# Altium PCB Main.PcbDoc (part 1 of 2)
Units mm, origin at the board's own origin, x right, y up, seen from the top; angles counter-clockwise.
Board outline 97 x 100 mm, 2 copper layers (Top Layer, Bottom Layer); 183 components, 114 nets, 627 pads, 356 vias.
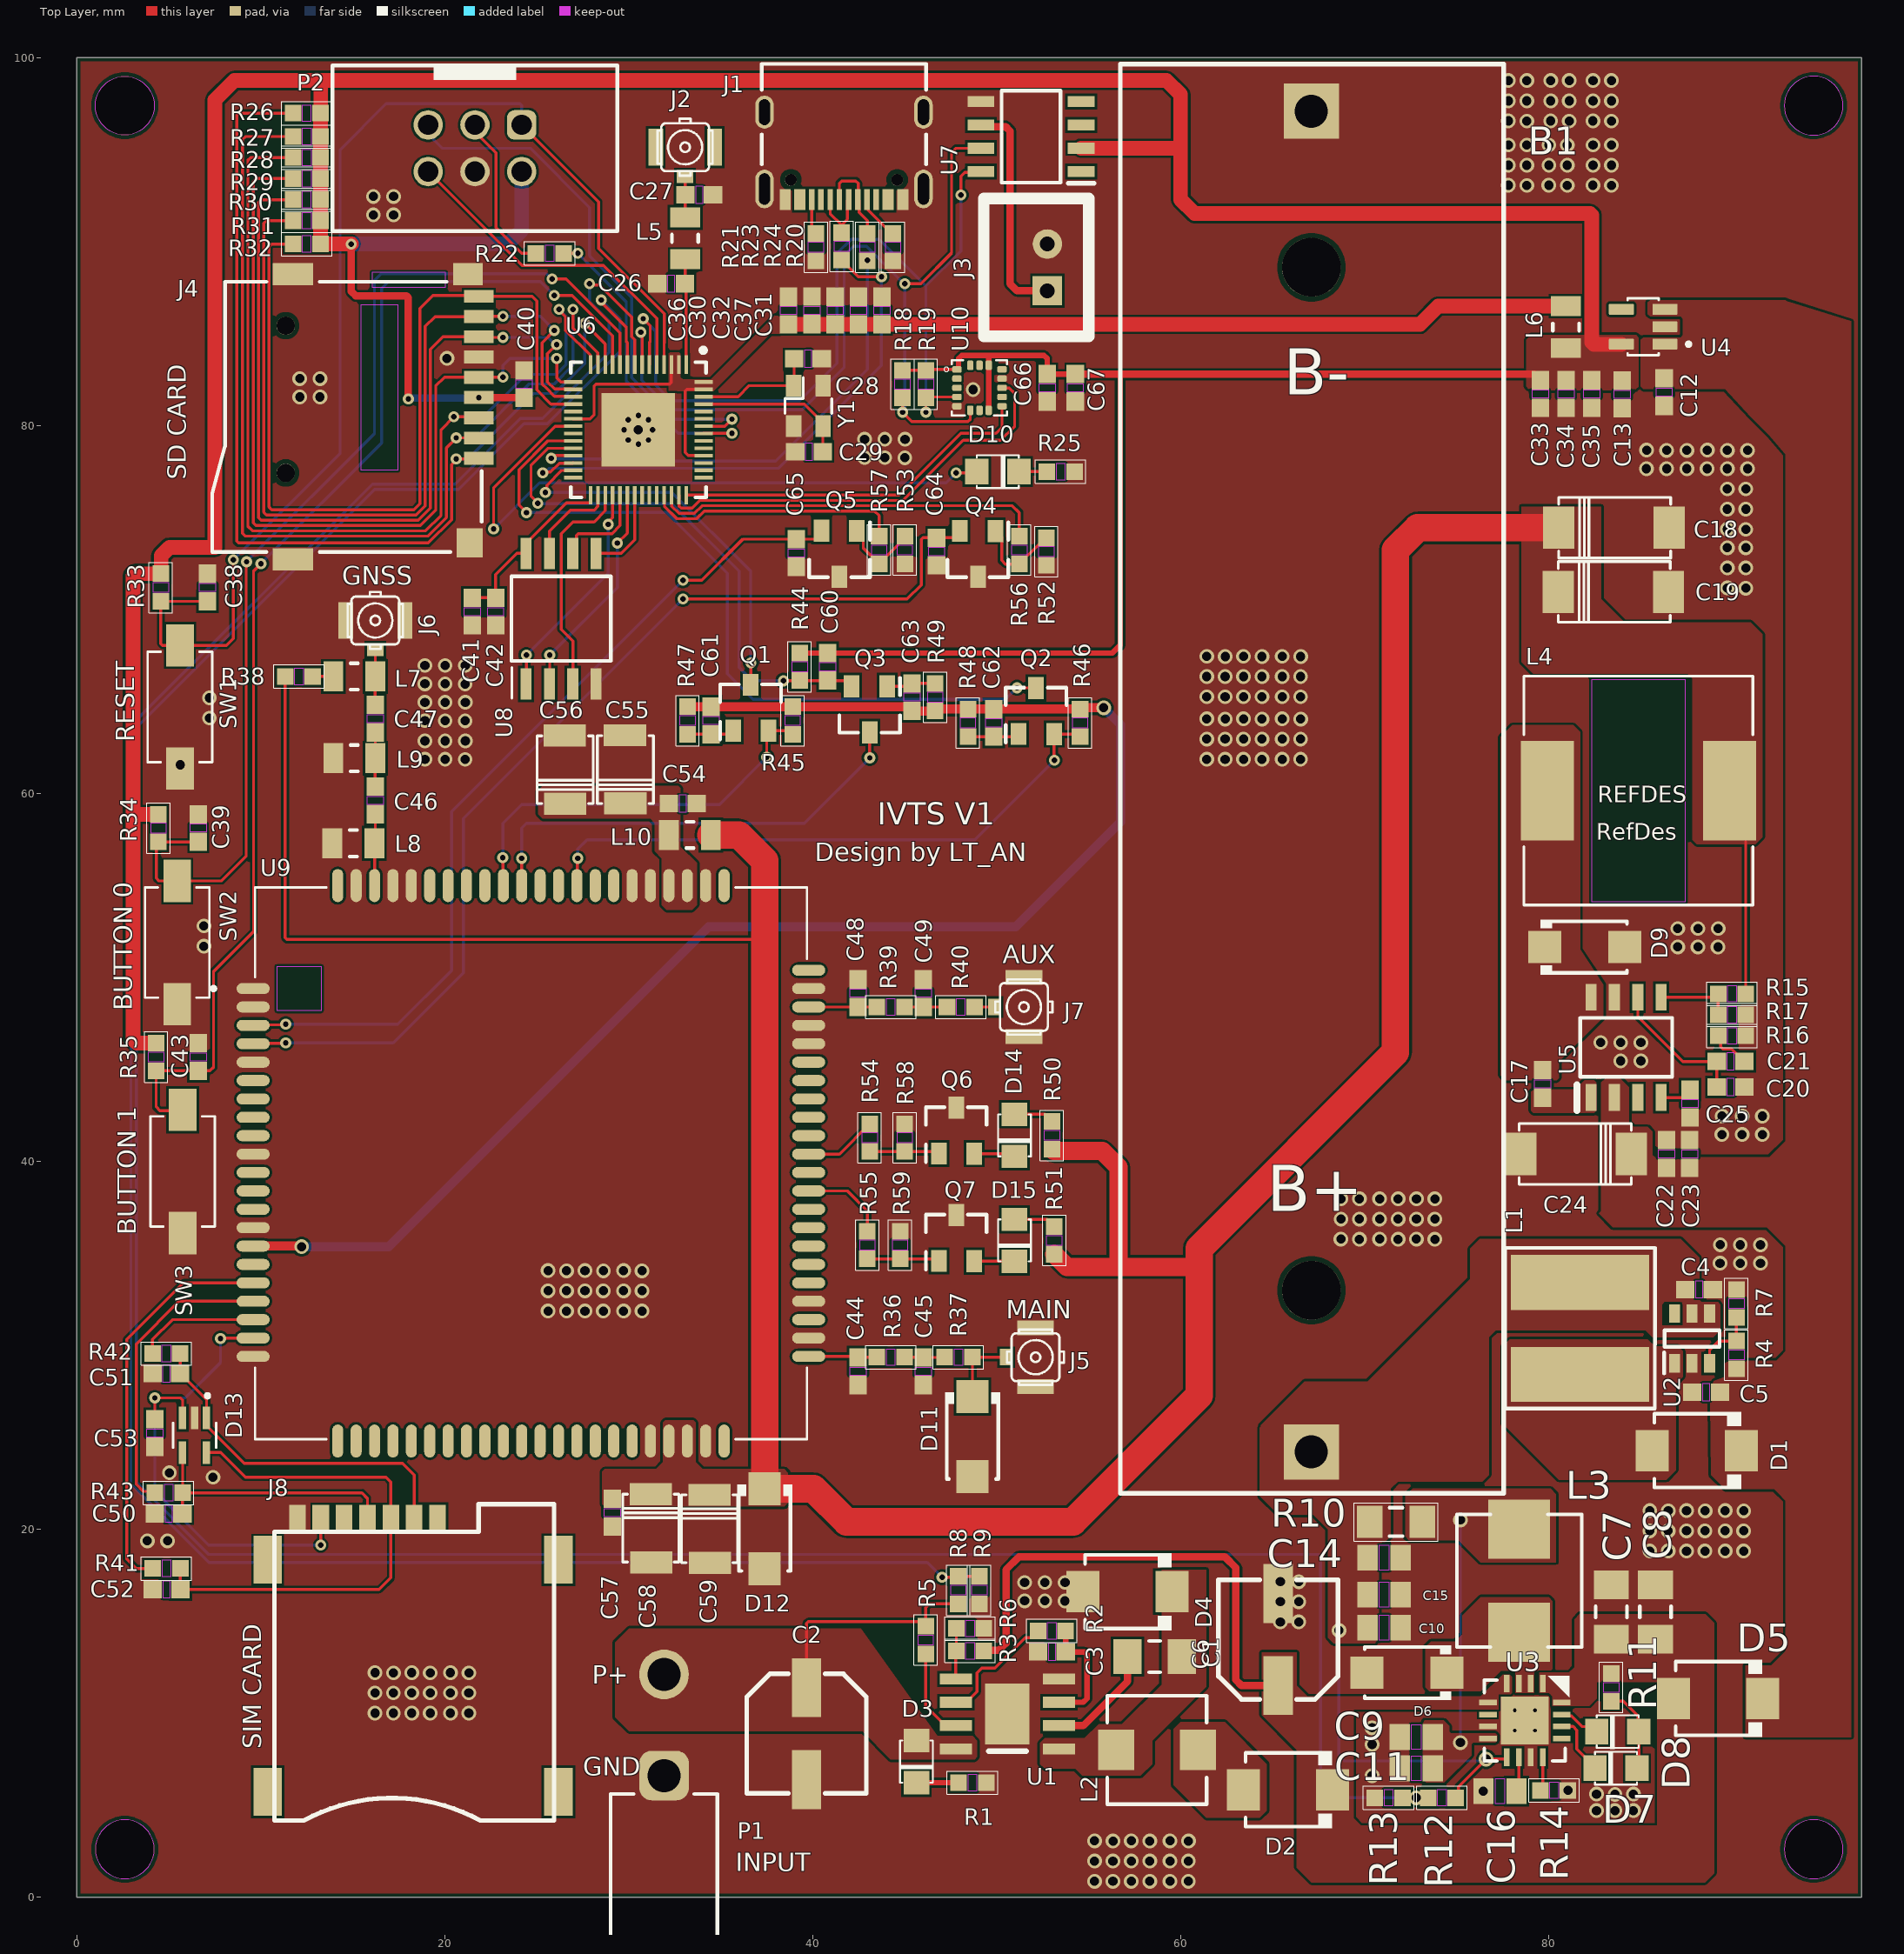
[diagram p0: Top Layer view]
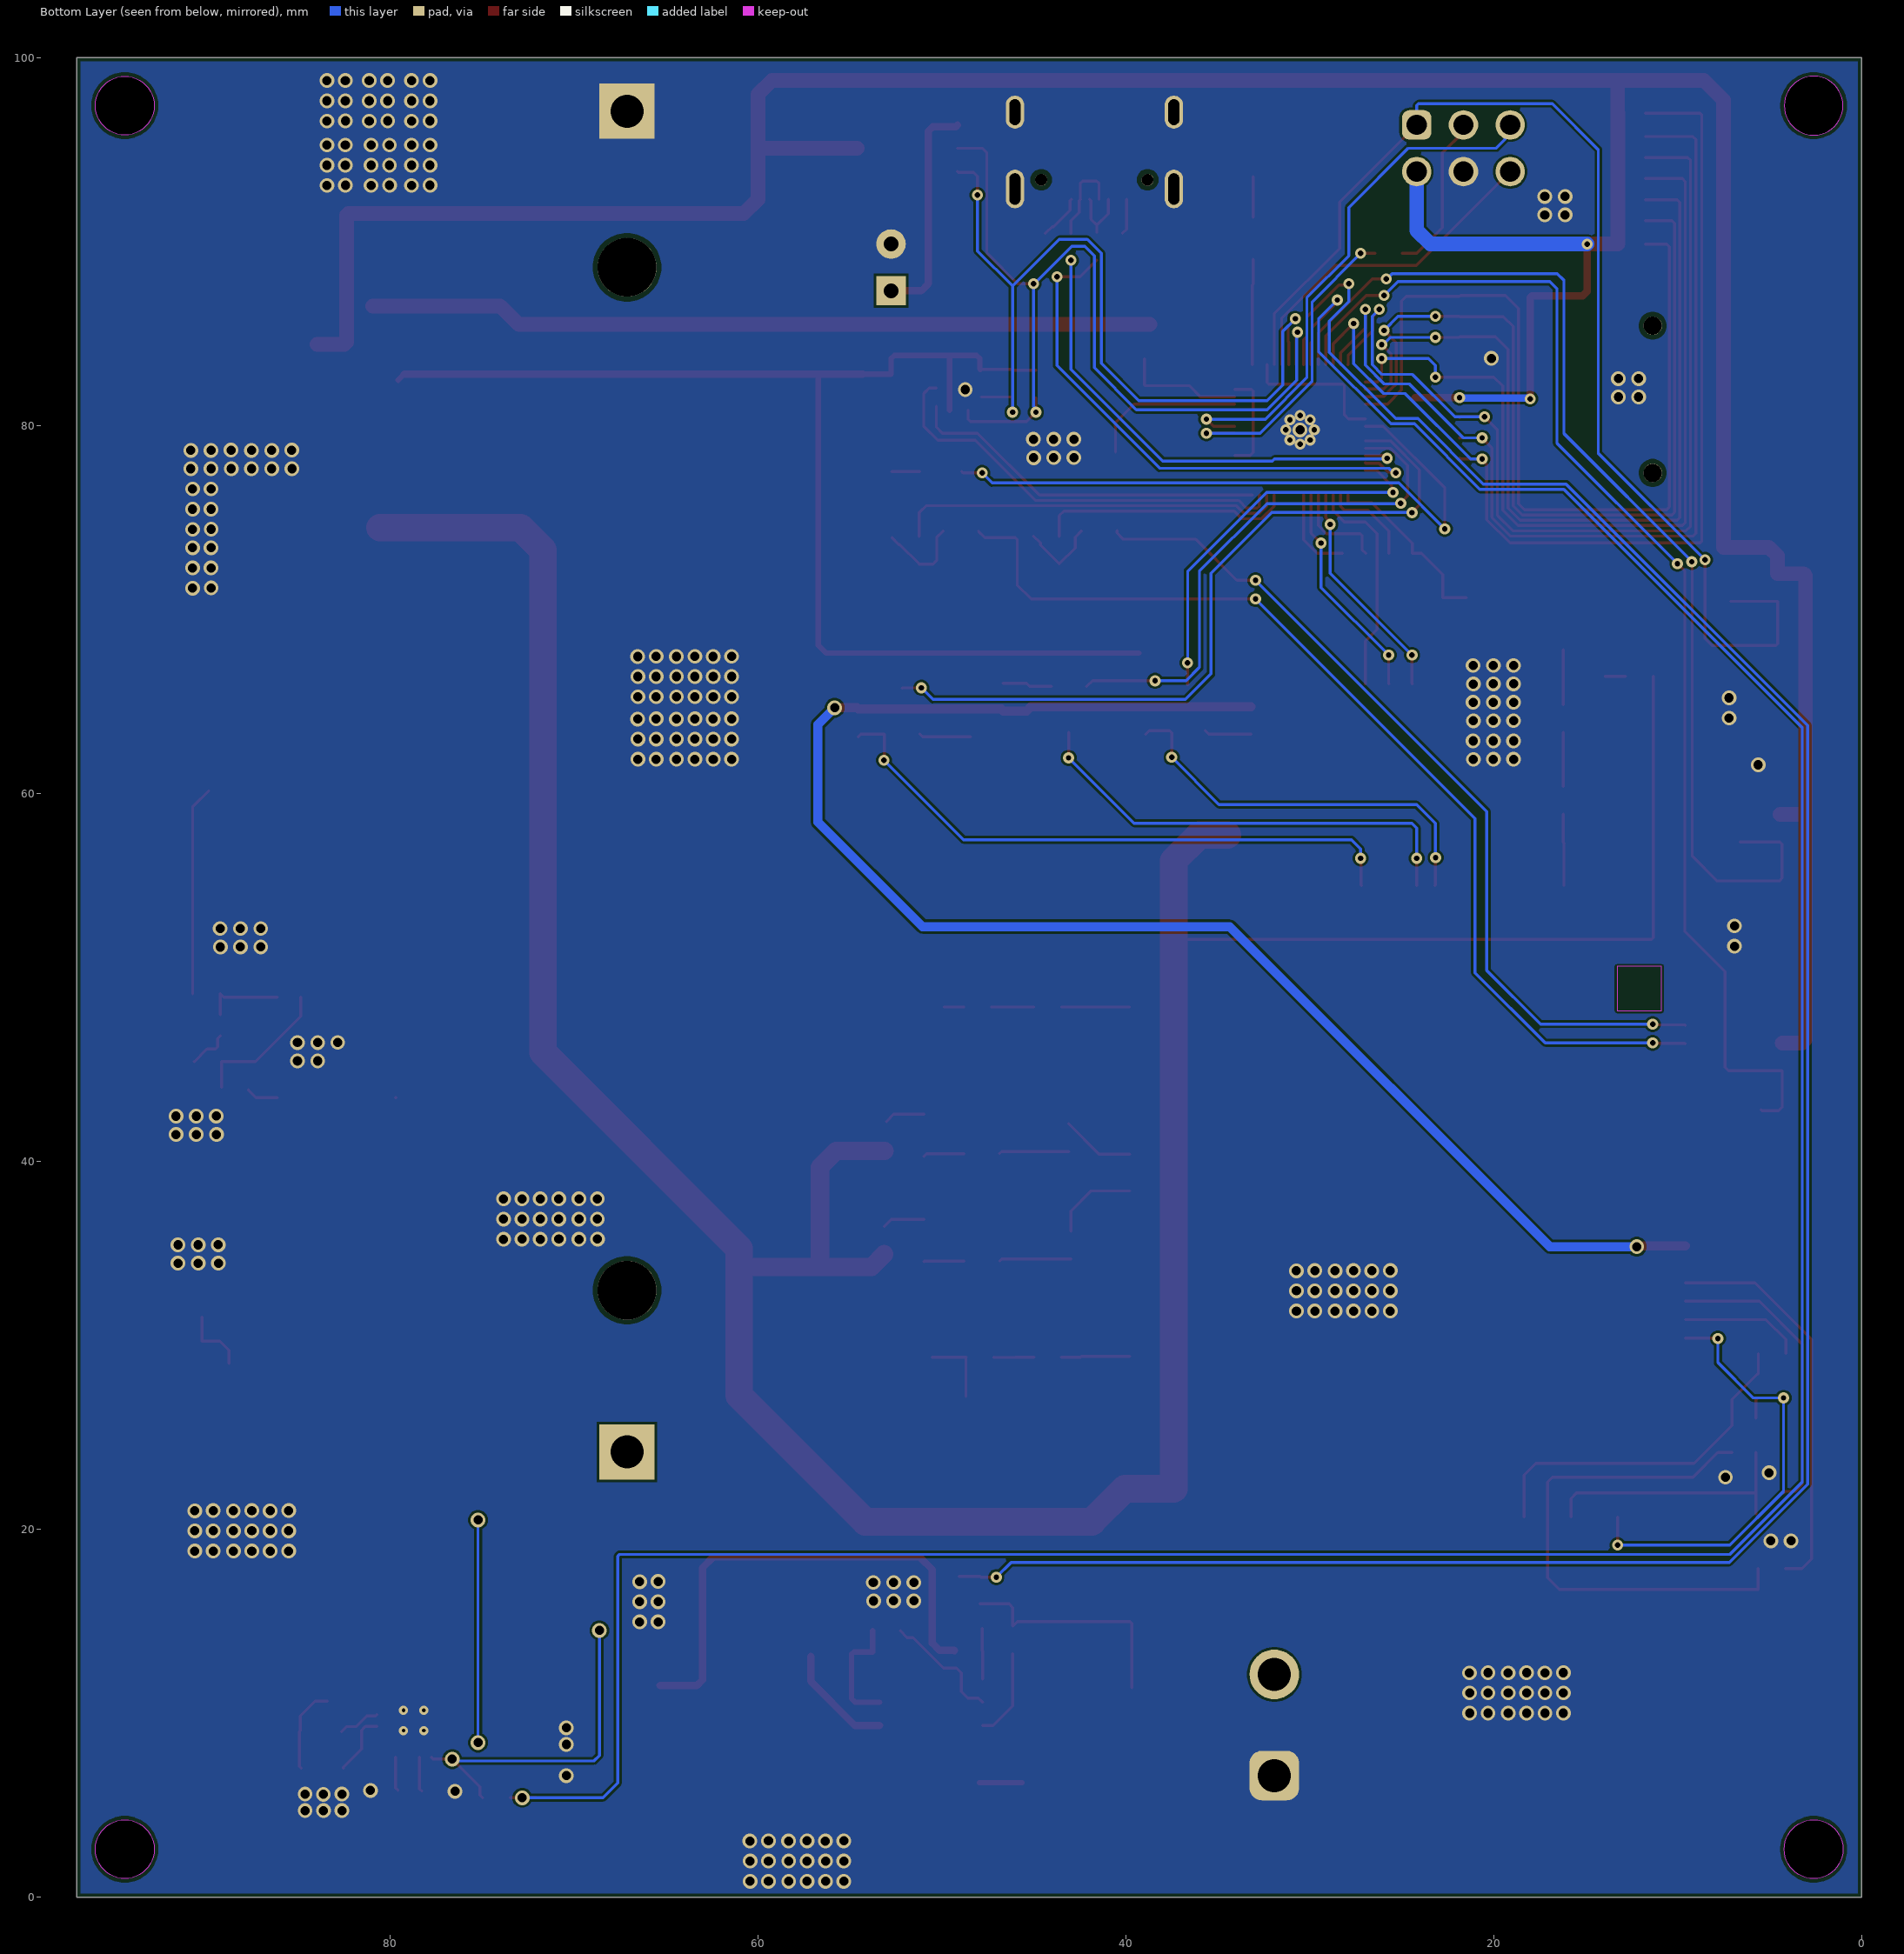
[diagram p1: Bottom Layer view, seen from below]

## Layer stack, top to bottom
Top Solder: solder mask 0.0102, Solder Resist, Dk 3.5
Top Layer: signal copper 0.0356
Dielectric 1: dielectric 0.32, FR-4, Dk 4.8
Bottom Layer: signal copper 0.0356
Bottom Solder: solder mask 0.0102, Solder Resist, Dk 3.5

## Board outline
0,0 0,100 97,100 97,0
cut-out: 92.8,97.4 ccw(c94.4,97.4) 94.4,95.8 ccw(c94.4,97.4) 96,97.4 ccw(c94.4,97.4) 94.4,99 ccw(c94.4,97.4)
cut-out: 92.8,2.6 ccw(c94.4,2.6) 94.4,1 ccw(c94.4,2.6) 96,2.6 ccw(c94.4,2.6) 94.4,4.2 ccw(c94.4,2.6)
cut-out: 2.6,95.8 cw(c2.6,97.4) 1,97.4 cw(c2.6,97.4) 2.6,99 cw(c2.6,97.4) 4.2,97.4 cw(c2.6,97.4)
cut-out: 1,2.6 ccw(c2.6,2.6) 2.6,1 ccw(c2.6,2.6) 4.2,2.6 ccw(c2.6,2.6) 2.6,4.2 ccw(c2.6,2.6)
cut-out: -139.8,-131 cw(c-139.8,-129.4) -141.4,-129.4 cw(c-139.8,-129.4) -139.8,-127.8 cw(c-139.8,-129.4) -138.2,-129.4 cw(c-139.8,-129.4)
cut-out: -141.4,-224.2 ccw(c-139.8,-224.2) -139.8,-225.8 ccw(c-139.8,-224.2) -138.2,-224.2 ccw(c-139.8,-224.2) -139.8,-222.6 ccw(c-139.8,-224.2)
cut-out: -231.6,-131 cw(c-231.6,-129.4) -233.2,-129.4 cw(c-231.6,-129.4) -231.6,-127.8 cw(c-231.6,-129.4) -230,-129.4 cw(c-231.6,-129.4)
cut-out: -233.2,-224.2 ccw(c-231.6,-224.2) -231.6,-225.8 ccw(c-231.6,-224.2) -230,-224.2 ccw(c-231.6,-224.2) -231.6,-222.6 ccw(c-231.6,-224.2)

## Design rules (kind name [scope] priority, off if disabled: settings)
BoardOutlineClearance [All] p1: gap=0.2 ignorepadtopadclearanceinfootprint=FALSE
Clearance [All] p1: gap=0.127 ignorepadtopadclearanceinfootprint=TRUE except(0.25: Arc-Hole Track-Hole SMDPad-Hole THPad-Hole Via-Hole Fill-Hole Poly-Hole Region-Hole Text-Hole)
ComponentClearance [All] p1: gap=0.127 collisioncheckmode=3 verticalgap=0.127 showdistances=TRUE
DiffPairsRouting [All] p1: maxlimit=0.254 minlimit=0.127 mostfreqgap=0.127 toplayer_minwidth=0.127 toplayer_maxwidth=25.4 toplayer_prefwidth=0.127 bottomlayer_minwidth=0.127 bottomlayer_maxwidth=25.4 bottomlayer_prefwidth=0.127 maxuncoupledlength=12.7
Height [All] p1: minheight=0 maxheight=1816.048 prefheight=12.7
HoleSize [All] p1: absolutevalues=TRUE maxlimit=6.3 minlimit=0.3 maxpercent=80.000 minpercent=20.000
HoleToHoleClearance [All] p1: gap=0.25 allowstackedmicrovias=FALSE
MinimumAnnularRing [All] p1: minimumring=0.076
MinimumSolderMaskSliver [All] p1: minsoldermaskwidth=0
PlaneClearance [All] p1: clearance=0.127
PlaneConnect PlaneConnectPowerPads [InPadClass('PowerPads')] p1: planeconnectstyle=Direct reliefexpansion=0.508 reliefentries=4 reliefconductorwidth=0.254 reliefairgap=0.254
PlaneConnect [All] p2: pad.planeconnectstyle=Relief pad.reliefexpansion=0.3 pad.reliefentries=4 pad.reliefconductorwidth=0.127 pad.reliefairgap=0.127 via.planeconnectstyle=Direct via.reliefexpansion=0.3 via.reliefentries=4 via.reliefconductorwidth=0.127 via.reliefairgap=0.127
PolygonConnect PolygonConnectPowerPads [All vs (InPadClass('PowerPads'))] p1: connectstyle=Direct reliefconductorwidth=0.254 reliefentries=4 polygonreliefangle="90 Angle" airgapwidth=0.254
PolygonConnect [All] p2: connectstyle=Direct reliefconductorwidth=0.127 reliefentries=4 polygonreliefangle="90 Angle" airgapwidth=0.127
RoutingVias [All] p1: holewidth=0.3 width=0.6 viastyle="Through Hole" minholewidth=0.3 minwidth=0.6 maxholewidth=0.6 maxwidth=6.6
SilkToSilkClearance [All] p1: silktosilkclearance=0
SilkToSolderMaskClearance [IsPad] p1: minsilkscreentomaskgap=0.127 clearancetoexposedcopper=TRUE
SolderMaskExpansion [All] p1: expansion=0.013 istentingtop=FALSE
SupplyNets "Schematic Supply Nets_9" [InNet('GND')] p1: voltage=0.000
SupplyNets "Schematic Supply Nets_7" [InNet('+5V-BUCK')] p2: voltage=0.000
SupplyNets "Schematic Supply Nets_2" [InNet('+12V')] p3: voltage=0.000
SupplyNets "Schematic Supply Nets_8" [InNet('V-MCU')] p4: voltage=0.000
SupplyNets "Schematic Supply Nets_6" [InNet('V-SIM')] p5: voltage=0.000
SupplyNets "Schematic Supply Nets_5" [InNet('+1.8V')] p6: voltage=0.000
SupplyNets "Schematic Supply Nets_4" [InNet('+5V')] p7: voltage=0.000
SupplyNets "Schematic Supply Nets_1" [InNet('FL-VDD')] p8: voltage=0.000
SupplyNets "Schematic Supply Nets" [InNet('+3.3V-MCU')] p9: voltage=0.000
Width [All] p1: maxlimit=25.4 minlimit=0.16 preferedwidth=0.16 minimp=50.000000 maximp=50.000000 favimp=50.000000
20 further rules are at their usual default settings.

## Classes and differential pairs
net class POWER: +5V-BUCK BATTERY+ V-MCU V-SIM
component class U_SIM7600CE: C44 C45 C46 C47 C48 C49 C50 C51 C52 C53 C54 C55 C56 C57 C58 C59 C60 C61 C62 C63 C64 C65 D11 D12 D13 D14 D15 J5 J6 J7 J8 L7 L8 L9 L10 Q1 Q2 Q3 Q4 Q5 Q6 Q7 R36 R38 R40 R42 R44 R45 R47 R49 R52 R54 R56 R59 U9
component class U_Power: B1 C1 C2 C3 C4 C5 C6 C7 C8 C9 C10 C11 C12 C13 C14 C15 C16 C17 C18 C19 C20 C21 C22 C23 C24 C25 D1 D2 D3 D4 D5 D6 D7 D8 D9 L1 L2 L3 L4 P1 R1 R2 R3 R4 R5 R6 R7 R8 R9 R10 R11 R12 R13 R15 R17 U1 U2 U3 U4 U5
component class U_LIS3DH: C66 C67 U10
component class U_ESP32S3: C26 C27 C28 C29 C30 C31 C32 C33 C34 C35 C36 C37 C38 C39 C40 C41 C42 C43 D10 J1 J2 J3 J4 L5 L6 P2 R17 R19 R21 R23 R26 R28 R30 R32 R34 SW1 SW2 SW3 U6 U7 U8 Y1

## Components (designator, comment, footprint, x,y, rotation, side; value= is the part's Value field where it differs from the comment)
B1 "18650-1C" 18650-1C 56.59,60.534 r90 top
C1 "0.1uF" CAP_1206 58.582,13.076 r0 top
C2 "22u" ALU-SMD-CAP-D-6.3mm 39.659,8.885 r270 top
C3 "1u" CAP_0603 52.994,13.33 r0 top
C4 "22u" CAP_0603 88.176,33.036 r180 top
C5 "22u" CAP_0603 88.557,27.448 r0 top
C6 "100u" ALU-SMD-CAP-D-6.3mm 65.3,14 r90 top
C7 "104" CAP_1206 83.4,15.5 r270 top
C8 "22u" CAP_1206 85.8,15.5 r270 top
C9 "104" CAP_0805 72.8,8.7 r0 top
C10 "105" CAP_0805 71.05,14.65 r180 top
C11 "106" CAP_0805 72.8,7 r0 top
C12 "1u" CAP_0603 86.276,81.823 r90 top
C13 "1u" CAP_0603 83.99,81.696 r90 top
C14 "106" CAP_0805 71.05,18.45 r180 top
C15 "104" CAP_0805 71.05,16.45 r180 top
C16 "104" CAP_0805 77.35,5.75 r0 top
C17 "0.1u" CAP_0603 79.667,44.212 r90 top
C18 "47u" C_Tanta_C6032 80.538,74.453 r0 top
C19 "47u" C_Tanta_C6032 80.512,70.96 r0 top
C20 "33p" CAP_0603 89.889,44.035 r180 top
C21 "1n" CAP_0603 89.889,45.432 r180 top
C22 "105" CAP_0603 86.398,40.402 r270 top
C23 "104" CAP_0603 87.668,40.402 r270 top
C24 "47u" C_Tanta_C6032 84.493,40.402 r180 top
C25 "10n" CAP_0603 87.674,43.14 r90 top
C26 "NP" CAP_0603 32.302,87.717 r0 top
C27 "1.8p" CAP_0603 33.826,92.543 r180 top
C28 "22p" CAP_0603 39.732,83.639 r180 top
C29 "22p" CAP_0603 39.795,78.573 r180 top
C30 "106" CAP_0603 39.949,86.269 r270 top
C31 "105" CAP_0603 43.759,86.257 r270 top
C32 "104" CAP_0603 41.219,86.257 r270 top
C33 "105" CAP_0603 79.544,81.722 r90 top
C34 "104" CAP_0603 80.941,81.722 r90 top
C35 "104" CAP_0603 82.338,81.722 r270 top
C36 "105" CAP_0603 38.679,86.257 r270 top
C37 "104" CAP_0603 42.489,86.257 r270 top
C38 "104" CAP_0603 7.099,71.201 r90 top
C39 "104" CAP_0603 6.591,58.12 r90 top
C40 "104" CAP_0603 24.301,82.256 r270 top
C41 "105" CAP_0603 21.489,69.891 r90 top
C42 "106" CAP_0603 22.759,69.891 r90 top
C43 "104" CAP_0603 6.591,45.674 r90 top
C44 "Cap_NP" CAP_0603 42.456,28.591 r90 top
C45 "Cap_NP" CAP_0603 46.012,28.591 r90 top
C46 "Cap_NP" CAP_0603 16.217,59.629 r270 top
C47 "33p" CAP_0603 16.217,64.074 r270 top
C48 "Cap_NP" CAP_0603 42.456,49.144 r270 top
C49 "Cap_NP" CAP_0603 46.012,49.144 r270 top
C50 "22p" CAP_0603 4.985,20.839 r180 top
C51 "22p" CAP_0603 4.858,28.459 r180 top
C52 "22p" CAP_0603 4.87,16.724 r180 top
C53 "104" CAP_0603 4.235,25.233 r270 top
C54 "1u" CAP_0603 32.931,59.452 r180 top
C55 "100u" C_Tanta_B3528 29.812,59.46 r90 top
C56 "100u" C_Tanta_B3528 26.538,59.452 r90 top
C57 "100n" CAP_0603 29.1,20.9 r90 top
C58 "100u" C_Tanta_B3528 31.2,21.9 r270 top
C59 "100u" C_Tanta_B3528 34.387,21.868 r270 top
C60 "470p" CAP_0603 40.811,66.889 r90 top
C61 "102" CAP_0603 34.461,63.968 r270 top
C62 "102" CAP_0603 49.828,63.841 r270 top
C63 "102" CAP_0603 45.383,65.238 r90 top
C64 "104" CAP_0603 46.728,73.158 r270 top
C65 "104" CAP_0603 39.101,73.08 r270 top
C66 "104" CAP_0603 52.743,82.058 r90 top
C67 "104" CAP_0603 54.267,82.058 r90 top
D1 "SS54" SMB 88.049,24.273 r180 top
D2 "SS54" SMB 65.821,5.837 r180 top
D3 "" LED-0805-Red 45.628,8.504 r270 top
D4 "SS54" SMB 57.1,16.6 r180 top
D5 "SS54" SMB 89.2,10.8 r180 top
D6 "SS34" SMA 72.3,12.2 r180 top
D7 "LED" LED-0805-Red 84.8,7 r180 top
D8 "LED" LED-0805-Red 84.9,9 r180 top
D9 "SS34" SMA 81.959,51.649 r0 top
D10 "" LED-0805-Red 48.911,77.497 r0 top
D11 "SMAJ5.0" SMA 48.679,25.035 r270 top
D12 "SMAJ5.0" SMA 37.382,20.026 r270 top
D13 "ESDA6V1W5" SOT65P210X110-5N 6.394,25.106 r270 top
D14 "LED" LED-0805-Red 50.965,42.561 r270 top
D15 "LED" LED-0805-Red 50.965,36.846 r270 top
J1 "629722000214" 629722000214 41.694,95.901 r180 top
J2 "ANT_CONN" IPEX 33.058,95.139 r270 top
J3 "NTC 10K" XH2.54M-2 52.749,87.336 r90 top
J4 "693071040911" 693071040911 16.297,80.48 r270 top
J5 "ANT_CONN" IPEX 52.108,29.353 r180 top
J6 "ANT_CONN" IPEX 16.217,69.408 r270 top
J7 "ANT_CONN" IPEX 51.473,48.394 r180 top
J8 "MicroSimcard" "MICRO SIM SOCKET" 18.272,13.188 r0 top
L1 "10uH" CD75 81.699,33.417 r180 top
L2 "4.7uH" IND-0520 58.709,7.996 r0 top
L3 "22uH" IND-0630 78.4,17.2 r90 top
L4 "4.7uH-3A" IND_CDRH127-4R7NC_SUM 84.88,60.158 r0 top
L5 "3nH" INDC-0805 33.058,90.186 r90 top
L6 "2.7nH" INDC-0805 80.937,85.36 r270 top
L7 "47n" INDC-0805 15.074,66.36 r180 top
L8 "L_NP" INDC-0805 15.024,57.293 r0 top
L9 "L_NP" INDC-0805 15.074,61.915 r0 top
L10 "FB-30R" INDC-0805 33.318,57.745 r0 top
P1 "64900229522" 64900229522 31.912,-0.894 r0 top
P2 "61200621621" 61200621621 21.634,95.083 r180 top
Q1 "2N3904" SOT-23 36.614,64.659 r0 top
Q2 "2N3904" SOT-23 52.128,64.485 r0 top
Q3 "2N3904" SOT-23 43.096,64.577 r180 top
Q4 "BC817" SOT-23 48.978,73.029 r180 top
Q5 "BC817" SOT-23 41.457,73.034 r180 top
Q6 "BC817" SOT-23 47.79,41.672 r0 top
Q7 "BC817" SOT-23 47.79,35.83 r0 top
R1 "10K" RES_0603 48.676,6.218 r0 top
R2 "100k" RES_0603 52.994,14.473 r0 top
R3 "110K" RES_0603 48.543,13.386 r0 top
R4 "91K" RES_0603 90.208,29.48 r270 top
R5 "10K" RES_0603 46.136,13.977 r90 top
R6 "20k" RES_0603 48.549,14.6 r180 top
R7 "12k" RES_0603 90.208,32.274 r270 top
R8 "100K" RES_0603 47.908,16.688 r90 top
R9 "10K" RES_0603 49.051,16.688 r270 top
R10 "0.1R" RES_1206 71.7,20.4 r180 top
R11 "1K" RES_0603 83.4,11.4 r90 top
R12 "100K" RES_0603 74.2,5.4 r0 top
R13 "10K" RES_0603 71.3,5.4 r0 top
R14 "50K" RES_0603 80.3,5.8 r180 top
R15 "20K/1%" RES_0603 89.96,49.109 r0 top
R16 "30K/1%" RES_0603 89.96,46.823 r180 top
R17 "5K/1%" RES_0603 89.96,47.966 r180 top
R18 "10K" RES_0603 44.875,82.256 r90 top
R19 "10K" RES_0603 46.145,82.256 r90 top
R20 "5.1K" RES_0603 44.361,89.701 r270 top
R21 "5.1K" RES_0603 40.17,89.701 r270 top
R22 "30R" RES_0603 25.698,89.368 r180 top
R23 "0R" RES_0603 41.567,89.752 r90 top
R24 "0R" RES_0603 42.964,89.701 r90 top
R25 "330" RES_0603 53.471,77.497 r0 top
R26 "10K" RES_0603 12.49,96.988 r0 top
R27 "10K" RES_0603 12.49,95.718 r0 top
R28 "10K" RES_0603 12.49,94.575 r0 top
R29 "10K" RES_0603 12.49,93.432 r0 top
R30 "10K" RES_0603 12.49,92.289 r0 top
R31 "10K" RES_0603 12.49,91.146 r0 top
R32 "10K" RES_0603 12.49,89.876 r0 top
R33 "10K" RES_0603 4.559,71.201 r90 top
R34 "10K" RES_0603 4.432,58.12 r90 top
R35 "10K" RES_0603 4.305,45.674 r90 top
R36 "0R" RES_0603 44.234,29.353 r0 top
R37 "0R" RES_0603 47.917,29.353 r0 top
R38 "10R" RES_0603 12.07,66.365 r0 top
R39 "0R" RES_0603 44.234,48.394 r0 top
R40 "0R" RES_0603 48.044,48.394 r0 top
R41 "51R" RES_0603 4.87,17.867 r180 top
R42 "51R" RES_0603 4.858,29.551 r180 top
R43 "51R" RES_0603 4.985,21.982 r180 top
R44 "1K" RES_0603 39.287,66.889 r90 top
R45 "1K" RES_0603 38.906,63.968 r270 top
R46 "1K" RES_0603 54.527,63.841 r270 top
R47 "4.7K" RES_0603 33.191,63.968 r270 top
R48 "4.7K" RES_0603 48.431,63.841 r270 top
R49 "4.7K" RES_0603 46.653,65.238 r90 top
R50 "1K" RES_0603 52.997,41.418 r270 top
R51 "1K" RES_0603 53.124,35.703 r270 top
R52 "47K" RES_0603 52.697,73.158 r270 top
R53 "47K" RES_0603 45.002,73.239 r270 top
R54 "4.7K" RES_0603 43.091,41.291 r90 top
R55 "4.7K" RES_0603 42.964,35.449 r90 top
R56 "4.7K" RES_0603 51.225,73.239 r270 top
R57 "4.7K" RES_0603 43.605,73.239 r270 top
R58 "47K" RES_0603 44.996,41.291 r270 top
R59 "47K" RES_0603 44.742,35.449 r270 top
SW1 "434121050816" 434121050816 5.6,64.704 r90 top
SW2 "434121050816" 434121050816 5.448,51.897 r90 top
SW3 "434121050816" 434121050816 5.748,39.451 r90 top
U1 "MP2482" SOP8-P 50.575,9.957 r90 top
U2 "SX1308" SOT23-6 87.795,30.369 r90 top
U3 "TP5100" QFN16 78.7,9.6 r270 top
U4 "AP2112K-3.3TRG1" SOT95P285X140-5N 85.133,85.379 r180 top
U5 "TPS54231" SOIC8-1.75H 84.208,46.197 r90 top
U6 "ESP32-S3" QFN56 30.518,79.772 r270 top
U7 "DS3231M" SOP8-P1.27 51.86,95.718 r180 top
U8 "W25Q128" SOIC127P790X216-8N 26.315,69.51 r90 top
U9 "SIM7600E" XCVR_SIM7600E 24.676,39.894 r0 top
U10 "LIS3DSH" LGA16R50P5X3_300X300X100N 49.06,82.058 r0 top
Y1 "40MHz" Y-3225 39.859,81.099 r270 top

## Footprints (in the part's own frame and the unit in brackets; to place one, negate y for a bottom-side part, rotate by r counter-clockwise, add the part's x,y. Pads: shape width x height; smd on the part's side, far side on the other; paste and mask are expansions set on the pad)
18650-1C [mm] "1Cell 18650 battery holder"
  rect 3x3 hole 1.8: 1(-36.334,-10.51) 2(36.566,-10.51)
  round 3.2 hole 3.2 unplated: ""(-27.544,-10.51) ""(28.076,-10.51)
  silkscreen extent -38.58,-20.96 39.12,-0.13, body extent -32.25,-19.53 32.75,-1.33, height 21.8
61200621621 [mm] "6 pins, straight, gold plating"
  rrect50% 1.6x1.6 hole 1.1: 1(-2.54,-1.27)
  round 1.6 hole 1.1: 2(-2.54,1.27) 3(0,-1.27) 4(0,1.27) 5(2.54,-1.27) 6(2.54,1.27)
  silkscreen extent -7.74,-4.5 7.74,4.5, body extent -7.64,-4.43 7.64,4.75, height 9.13
64900229522 [mm] "4.20mm Male Dual Row Angled Header, 2p"
  rrect50% 2.7x2.7 hole 1.8: 1(0,7.5)
  round 2.7 hole 1.8: 2(0,13)
  silkscreen extent -2.9,-6.5 2.9,6.5, body extent -2.7,-6.4 3.02,13.57, height 11.43
434121050816 [mm] "SMD Tact Switch, body 6x3.5mm"
  rect 2.3x1.5 smd: 1(-3.35,0) 2(3.35,0)
  silkscreen extent -3,-1.75 3,1.75, body extent -4,-1.75 4,1.75, height 5
629722000214 [mm] "USB TYPE C VERTICAL PLUG"
  rect 0.6x1.14 smd: A1/B12(-3.2,3.605) A4/B9(-2.4,3.605) A9/B4(2.4,3.605) A12/B1(3.2,3.605)
  rect 0.3x1.14 smd: A5(-1.25,3.605) A6(-0.25,3.605) A7(0.25,3.605) A8(1.25,3.605) B5(1.75,3.605) B6(0.75,3.605) B7(-0.75,3.605) B8(-1.75,3.605)
  round 0.65 hole 0.65 unplated: MH1(-2.89,2.535) MH2(2.89,2.535)
  oval 1x2.1 hole 0.6 slot 1.7 at 90 deg: Shell(-4.32,3.035) Shell(4.32,3.035)
  oval 1x1.8 hole 0.6 slot 1.4 at 90 deg: Shell(-4.32,-1.145) Shell(4.32,-1.145)
  silkscreen extent -4.47,-3.76 4.47,1.69, body extent -4.79,-3.76 4.79,3.95, height 3.33
693071040911 [mm] "MicroSD push-push CD SMT"
  rect 0.7x1.6 smd: 1(2.25,5.55) 2(1.15,5.55) 3(0.05,5.55) 4(-1.05,5.55) 5(-2.15,5.55) 6(-3.25,5.55) 7(-4.35,5.55) 8(-5.45,5.55) 9(-6.55,5.55)
  round 1 hole 1 unplated: MH1(-4.95,-4.95) MH2(3.05,-4.95)
  rect 1.2x1.6 smd: Shell(-7.75,4.95)
  rect 1.2x2.2 smd: Shell(-7.75,-4.55) Shell(7.75,-4.55)
  rect 1.6x1.4 smd: Shell(6.85,5.05)
  Top Layer keep-out region: -6.1,1.15 2.9,1.15 2.9,-0.85 -6.1,-0.85
  Top Layer keep-out region: -7.05,3.75 -7.85,3.75 -7.85,-0.25 -7.05,-0.25
  silkscreen extent -7.35,-8.95 7.35,5.7, body extent -8.05,-8.95 8.05,6.05, height 1.9
ALU-SMD-CAP-D-6.3mm [mm]
  rect 3.2x1.6 smd: 1(-2.5,0) 2(2.5,0)
  silkscreen extent -3.25,-3.25 3.25,3.25, body extent -3.64,-3.3 3.66,3.3, height 5.8
C_Tanta_B3528 [mm]
  rect 1.2x2.3 smd: 1(0,0) 2(3.708,0.025)
  silkscreen extent 0,-1.52 3.68,1.52, body extent 0.08,-1.4 3.58,1.4, height 1.9
C_Tanta_C6032 [mm]
  rect 1.7x2.3 smd: 1(0,0) 2(6,0)
  silkscreen extent 0,-1.65 6.1,1.65, body extent 0.05,-1.6 6.05,1.6, height 2.5
CAP_0603 [mm] "Chip Capacitor, 2-Leads, Body 1.60x0.80mm, IPC Medium Density"
  rect 1x0.95 smd: 1(-0.75,0) 2(0.75,0)
  Top Layer keep-out region: -0.203,-0.457 0.203,-0.457 0.203,0.457 -0.203,0.457
  body extent -0.85,-0.45 0.85,0.45, height 0.9
CAP_0805 [mm] "Chip Capacitor, 2-Leads, Body 2.00x1.25mm, IPC Medium Density"
  rect 1.1x1.4 smd: 1(-0.9,0) 2(0.9,0)
  Top Layer keep-out region: -0.279,-0.66 0.279,-0.66 0.279,0.66 -0.279,0.66
  body extent -1.05,-0.67 1.05,0.67, height 1.25
CAP_1206 [mm] "Chip Capacitor, 2-Leads, Body 3.20x1.60mm, IPC Low Density"
  rect 1.55x1.9 smd: 1(-1.475,0) 2(1.475,0)
  silkscreen extent -0.3,-0.85 0.3,0.85, body extent -1.7,-0.9 1.7,0.9, height 1.05
CD75 [mm]
  rect 7.5x3 smd: 1(0,0) 2(0,5)
  silkscreen extent -4.08,-1.88 4.06,6.86, body extent -3.5,-1.29 3.5,6.37, height 5.04
IND-0520 [mm] "Molded Inductor, 2-Leads, Body 5.20x5.70mm, IPC Medium Density"
  rect 1.95x2.2 smd: 1(-2.225,0) 2(2.225,0)
  silkscreen extent -2.7,-2.95 2.7,2.95, body extent -2.8,-2.5 2.8,2.5, height 3.01
IND-0630 [mm] "Molded Inductor, 2-Leads, Body 7.05x7.65mm, IPC Low Density"
  rect 3.2x3.35 smd: 1(-2.8,0) 2(2.8,0)
  silkscreen extent -3.6,-3.39 3.6,3.39, body extent -3.62,-3.32 3.68,3.38, height 3.01
IND_CDRH127-4R7NC_SUM [mil]
  rect 114x213 smd paste+0 mask+0: 1(-195,0) 2(195,0)
  Top Layer keep-out region: -100,-238 -100,238 100,238 100,-238
  silkscreen extent -245,-245 245,245, body extent -240,-240 240,240, height 315
INDC-0805 [mm] "Chip Inductor, 2-Leads, Body 2.10x1.35mm, IPC Low Density"
  rect 1.08x1.63 smd: 1(-1.14,0) 2(1.14,0)
  silkscreen extent -0.2,-0.72 0.2,0.72, body extent -1.1,-0.75 1.1,0.75, height 1
IPEX [mm] "IPX surface mount receptacle plug"
  rect 0.7x0.9 smd: 1(1.6,0)
  rect 2x0.8 smd: 2(0,1.6) 2(0,-1.6)
  silkscreen extent -1.55,-1.5 1.55,1.5, body extent -1.55,-1.53 1.45,1.47, height 1.25
LED-0805-Red [mil]
  rect 50x55 smd: 1(0,0) 2(90,0)
  silkscreen extent 0,-35 90,37, body extent 5,-25 85,25, height 43
LGA16R50P5X3_300X300X100N [mm]
  rrect53% 0.52x0.35 smd mask+0: 1(-1.225,1) 2(-1.225,0.5) 3(-1.225,0) 4(-1.225,-0.5) 5(-1.225,-1) 9(1.225,-1) 10(1.225,-0.5) 11(1.225,0) 12(1.225,0.5) 13(1.225,1)
  rrect53% 0.35x0.52 smd mask+0: 6(-0.5,-1.225) 7(0,-1.225) 8(0.5,-1.225) 14(0.5,1.225) 15(0,1.225) 16(-0.5,1.225)
  silkscreen extent -1.93,-1.5 1.5,1.5
"MICRO SIM SOCKET" [mm]
  rect 0.9x1.35 smd: 1(-5.02,7.473) 2(-2.48,7.473) 3(0.06,7.473) 5(-6.29,7.473) 6(-3.75,7.473) 7(-1.21,7.473) 8(1.33,7.473)
  rect 1.55x2.6 smd: 4(-7.9,-7.472) 4(-7.9,5.148) 4(7.9,-7.472) 4(7.9,5.148)
  silkscreen extent -7.54,-9.03 7.66,8.17, body extent -8.14,-9.03 8.26,8.17, height 1.36
QFN16 [mm] "QFN, 16-Leads, Body 4.00x4.00mm, Pitch 0.65mm, Thermal Pad 2.60x2.60mm, IPC Low Density"
  rect 0.95x0.3 smd: 1(-2,0.975) 2(-2,0.325) 3(-2,-0.325) 4(-2,-0.975) 9(2,-0.975) 10(2,-0.325) 11(2,0.325) 12(2,0.975)
  rect 0.3x0.95 smd: 5(-0.975,-2) 6(-0.325,-2) 7(0.325,-2) 8(0.975,-2) 13(0.975,2) 14(0.325,2) 15(-0.325,2) 16(-0.975,2)
  rect 2.6x2.6 smd: 17(0,0)
  silkscreen extent -2.41,-2.2 2.2,2.41, body extent -2.1,-2.1 2.1,2.1, height 0.9
QFN56 [mm] "QFN, 56-Leads, Body 7.00x7.00mm, Pitch 0.40mm, Thermal Pad 4.00x4.00mm, IPC Low Density"
  rect 1x0.2 smd: 1(-3.55,2.6) 2(-3.55,2.2) 3(-3.55,1.8) 4(-3.55,1.4) 5(-3.55,1) 6(-3.55,0.6) 7(-3.55,0.2) 8(-3.55,-0.2) 9(-3.55,-0.6) 10(-3.55,-1) 11(-3.55,-1.4) 12(-3.55,-1.8) 13(-3.55,-2.2) 14(-3.55,-2.6) 29(3.55,-2.6) 30(3.55,-2.2) 31(3.55,-1.8) 32(3.55,-1.4) 33(3.55,-1) 34(3.55,-0.6) 35(3.55,-0.2) 36(3.55,0.2) 37(3.55,0.6) 38(3.55,1) 39(3.55,1.4) 40(3.55,1.8) 41(3.55,2.2) 42(3.55,2.6)
  rect 0.2x1 smd: 15(-2.6,-3.55) 16(-2.2,-3.55) 17(-1.8,-3.55) 18(-1.4,-3.55) 19(-1,-3.55) 20(-0.6,-3.55) 21(-0.2,-3.55) 22(0.2,-3.55) 23(0.6,-3.55) 24(1,-3.55) 25(1.4,-3.55) 26(1.8,-3.55) 27(2.2,-3.55) 28(2.6,-3.55) 43(2.6,3.55) 44(2.2,3.55) 45(1.8,3.55) 46(1.4,3.55) 47(1,3.55) 48(0.6,3.55) 49(0.2,3.55) 50(-0.2,3.55) 51(-0.6,3.55) 52(-1,3.55) 53(-1.4,3.55) 54(-1.8,3.55) 55(-2.2,3.55) 56(-2.6,3.55)
  rect 4x4 smd: 57(0,0)
  silkscreen extent -4.45,-3.67 3.67,3.68, body extent -3.55,-3.55 3.55,3.55, height 0.9
RES_0603 [mm] "Chip Resistor, 2-Leads, Body 1.60x0.80mm, IPC Medium Density"
  rect 0.9x0.9 smd: 1(-0.75,0) 2(0.75,0)
  Top Layer keep-out region: -0.254,-0.432 0.254,-0.432 0.254,0.432 -0.254,0.432
  silkscreen extent -1.37,-0.64 1.37,0.64, body extent -0.85,-0.45 0.85,0.45, height 0.45
RES_1206 [mm] "Chip Resistor, 2-Leads, Body 3.30x1.60mm, IPC Medium Density"
  rect 1.4x1.75 smd: 1(-1.425,0) 2(1.425,0)
  silkscreen extent -2.29,-1.04 2.29,1.04, body extent -1.78,-0.87 1.78,0.87, height 0.6
SMA [mm] "Molded Diode, 2-Leads, Body 4.31x2.49mm, IPC Low Density"
  rect 1.8x1.75 smd: 1(2.175,0) 2(-2.175,0)
  silkscreen extent -2.41,-1.5 2.3,1.5, body extent -2.5,-1.4 2.5,1.4, height 2.31
SMB [mm] "Molded Diode, 2-Leads, Body 4.31x3.62mm, IPC Low Density"
  rect 1.8x2.25 smd: 1(2.425,0) 2(-2.425,0)
  silkscreen extent -2.41,-2.11 2.3,2.11, body extent -2.5,-1.97 2.5,1.97, height 2.62
SOIC8-1.75H [mm] "SOIC, 8-Leads, Body 4.91x3.90mm, Pitch 1.27mm, IPC Medium Density"
  rect 1.45x0.6 smd: 1(-2.725,1.905) 2(-2.725,0.635) 3(-2.725,-0.635) 4(-2.725,-1.905) 5(2.725,-1.905) 6(2.725,-0.635) 7(2.725,0.635) 8(2.725,1.905)
  silkscreen extent -3.43,-2.5 1.6,2.67, body extent -3,-2.5 3,2.5, height 1.75
SOIC127P790X216-8N [mm] "SOIC, 8-Leads, Body 5.28x5.28mm, Pitch 1.27mm, IPC Medium Density"
  rect 1.7x0.6 smd: 1(-3.55,1.905) 2(-3.55,0.635) 3(-3.55,-0.635) 4(-3.55,-1.905) 5(3.55,-1.905) 6(3.55,-0.635) 7(3.55,0.635) 8(3.55,1.905)
  silkscreen extent -4.32,-2.7 2.3,2.7, body extent -3.95,-2.7 3.95,2.7, height 2.16
SOP8-P [mm]
  rect 0.6x1.75 smd: 1(-1.905,-2.8) 2(-0.635,-2.8) 3(0.635,-2.8) 4(1.905,-2.8) 5(1.905,2.8) 6(0.635,2.8) 7(-0.635,2.8) 8(-1.905,2.8)
  rect 3.3x2.41 smd paste-3: EXP(0,0)
  silkscreen extent -2.03,-1.02 -2.03,1.02
SOP8-P1.27 [mm] "SOP, 8-Leads, Body 4.90x3.90mm, Pitch 1.27mm, IPC Medium Density"
  rect 1.45x0.6 smd: 1(-2.725,1.905) 2(-2.725,0.635) 3(-2.725,-0.635) 4(-2.725,-1.905) 5(2.725,-1.905) 6(2.725,-0.635) 7(2.725,0.635) 8(2.725,1.905)
  silkscreen extent -3.43,-2.5 1.6,2.54, body extent -3,-2.5 3,2.5, height 1.75
SOT23-6 [mm] "SOT23, 6-Leads, Body 2.90x2.80mm, Pitch 0.95mm, IPC Medium Density"
  rect 1x0.6 smd: 1(-1.35,0.95) 2(-1.35,0) 3(-1.35,-0.95) 4(1.35,-0.95) 5(1.35,0) 6(1.35,0.95)
  silkscreen extent -1.91,-1.5 0.45,1.52, body extent -1.5,-1.5 1.5,1.5, height 1.45
SOT65P210X110-5N [mm]
  rect 1.23x0.4 smd: 1(-0.94,0.65) 2(-0.94,0) 3(-0.94,-0.65) 4(0.94,-0.65) 5(0.94,0.65)
  silkscreen extent -2.25,-1.17 0.68,1.17, body extent -1.05,-1 1.05,1, height 1.1
SOT95P285X140-5N [mm]
  rrect15% 1.35x0.6 smd: 1(-1.185,0.95) 2(-1.185,0) 3(-1.185,-0.95) 4(1.185,-0.95) 5(1.185,0.95)
  silkscreen extent -2.57,-1.55 0.85,1.55, body extent -1.5,-1.4 1.5,1.4, height 1.4
SOT-23 [mm] "SOT 23 _ 1-3-2"
  rect 0.85x1.2 smd: 1(-0.94,-1.245) 2(0.986,-1.25) 3(0.005,1.25)
  silkscreen extent -1.65,-1.71 1.66,1.27, body extent -1.47,-1.33 1.53,1.17, height 1.06
XCVR_SIM7600E [mm]
  oval 1.8x0.6 smd: 1(-15.1,9.5) 2(-15.1,8.5) 3(-15.1,7.5) 4(-15.1,6.5) 5(-15.1,5.5) 6(-15.1,4.5) 7(-15.1,3.5) 8(-15.1,2.5) 9(-15.1,1.5) 10(-15.1,0.5) 11(-15.1,-0.5) 12(-15.1,-1.5) 13(-15.1,-2.5) 14(-15.1,-3.5) 15(-15.1,-4.5) 16(-15.1,-5.5) 17(-15.1,-6.5) 18(-15.1,-7.5) 19(-15.1,-8.5) 20(-15.1,-9.5) 41(15.1,-9.5) 42(15.1,-8.5) 43(15.1,-7.5) 44(15.1,-6.5) 45(15.1,-5.5) 46(15.1,-4.5) 47(15.1,-3.5) 48(15.1,-2.5) 49(15.1,-1.5) 50(15.1,-0.5) 51(15.1,0.5) 52(15.1,1.5) 53(15.1,2.5) 54(15.1,3.5) 55(15.1,4.5) 56(15.1,5.5) 57(15.1,6.5) 58(15.1,7.5) 59(15.1,8.5) 60(15.1,9.5) 81(-15.1,-10.5) 82(15.1,-10.5) 85(15.1,10.5)
  oval 0.6x1.8 smd: 21(-9.5,-15.1) 22(-8.5,-15.1) 23(-7.5,-15.1) 24(-6.5,-15.1) 25(-5.5,-15.1) 26(-4.5,-15.1) 27(-3.5,-15.1) 28(-2.5,-15.1) 29(-1.5,-15.1) 30(-0.5,-15.1) 31(0.5,-15.1) 32(1.5,-15.1) 33(2.5,-15.1) 34(3.5,-15.1) 35(4.5,-15.1) 36(5.5,-15.1) 37(6.5,-15.1) 38(7.5,-15.1) 39(8.5,-15.1) 40(9.5,-15.1) 61(9.5,15.1) 62(8.5,15.1) 63(7.5,15.1) 64(6.5,15.1) 65(5.5,15.1) 66(4.5,15.1) 67(3.5,15.1) 68(2.5,15.1) 69(1.5,15.1) 70(0.5,15.1) 71(-0.5,15.1) 72(-1.5,15.1) 73(-2.5,15.1) 74(-3.5,15.1) 75(-4.5,15.1) 76(-5.5,15.1) 77(-6.5,15.1) 78(-7.5,15.1) 79(-8.5,15.1) 80(-9.5,15.1) 83(10.5,-15.1) 84(-10.5,-15.1) 86(-10.5,15.1) 87(10.5,15.1)
  Keep-Out Layer region: -11.4,8.3 -13.8,8.3 -13.8,10.7 -11.4,10.7
  silkscreen extent -17.35,-15 15,15, body extent -15,-15 15,15, height 3.1
XH2.54M-2 [mm]
  rect 1.6x1.6 hole 0.8: 1(0,0)
  round 1.6 hole 0.8: 2(2.54,0)
  silkscreen extent -2.48,-2.26 5.02,3.46, body extent -2.48,-2.26 5.02,3.48, height 6.91
Y-3225 [mm]
  rect 1.191x0.839 smd paste+0 mask+0: 1(-1.078,-0.902) 2(1.129,-0.902) 3(1.129,0.698) 4(-1.078,0.698)
  silkscreen extent -1.52,-1.37 0.42,1.17, body extent -1.57,-1.35 1.63,1.15, height 0.6

## Part data
B1: library part 18650-2C
C1 C3 C4 C5 C7 C8 C9 C10 C11 C12 C13 C14 C15 C16 C17 C20 C21 C22 C23 C25 C26 C27 C28 C29 C30 C31 C32 C33 C34 C35 C36 C37 C38 C39 C40 C41 C42 C43 C47 C50 C51 C52 C53 C54 C57 C60 C61 C62 C63 C64 C65 C66 C67: library part Cap_NP, "Non-polarized capacitor"
C2 C6: library part Cap_Alu, "Polarized aluminum capacitor"
C18 C19 C24 C55 C56 C58 C59: library part Cap_Tatan, "Polarized tantaLum capacitor"
C44 C45 C46 C48 C49: "Non-polarized capacitor"
D1 D2 D4 D5 D6 D9: library part S-Diode, "Schottky diode"
D3 D10: library part LED, "Light Emitting Diode"
D7 D8 D14 D15: "Light Emitting Diode"
D11 D12: library part TVS-Diode, "TVS diode"
D13: "Integrated Circuit", Manufacturer_Name=STMicroelectronics, Mouser Part Number=511-ESDA6V1W5, Arrow Part Number=ESDA6V1W5, Arrow Price/Stock=https://www.arrow.com/en/products/esda6v1w5/stmicroelectronics?utm_currency=USD&region=nac, Datasheet Link=http://www.st.com/st-web-ui/static/active/en/resource/technical/document/datasheet/CD00064033.pdf, Height=1.1mm, Manufacturer_Part_Number=ESDA6V1W5, Mouser Price/Stock=https://www.mouser.co.uk/ProductDetail/STMicroelectronics/ESDA6V1W5?qs=9NrABl3fj%2FrhT5vdkOmqXg%3D%3D
J1: "WR-COM USB 2.0 Type C Receptacle Horizontal SMT", Manufacturer="Wurth Elektronik", Max Operating Temperature=85°C, Min Operating Temperature=-40°C, Rated Current=5, Working Voltage="48V (DC)", Application="USB 2.0", Category="Input/Output Connector", ComponentLink1Description="Website Link", ComponentLink1URL=https://www.we-online.com/redexpert/article/629722000214?ad, ComponentLink2Description="Datasheet Link", ComponentLink2URL=https://www.we-online.com/redexpert/spec/629722000214?ad, Gender=Receptacle, Interface Type="Type C", Manufacturer Part Number=629722000214, Match Code=WR-USB, Mount="Surface Mount", Number of Pins=16, Number of Ports=1, Orientation=Horizontal, Packaging="Tape and Reel"
J2 J5 J6 J7: "ATENNA PIN 1"
J3: library part Conn_Cai_2P_2.54
J4: "WR-CRD SD Card Connector Push & Push Socket, 9 pins", Manufacturer="Wurth Elektronik", Max Operating Temperature="85 °C", Min Operating Temperature="-25 °C", Application="Micro SD Card", Category="Input/Output Connector", ComponentLink1Description="Website Link", ComponentLink1URL=https://www.we-online.com/redexpert/article/693071040911?ad, ComponentLink2Description="Datasheet Link", ComponentLink2URL=https://www.we-online.com/redexpert/spec/693071040911?ad, Durability="10000 Mating cycles", Gender=Socket, Manufacturer Part Number=693071040911, Match Code=WR-CRD, Mount="Surface Mount", Number of Pins=9, Packaging="Tape and Reel", Type="Push & Push"
J8: "Micro Simcard Socket"
L1 L2 L3 L4: library part "Inductor Iron", "Magnetic-Core Inductor", LatestRevisionDate=17-Jul-2002, LatestRevisionNote="Re-released for DXP Platform.", PackageDescription="Axial Device, Thru-Hole; 2 Leads; 0.9 in Pin Spacing", PackageReference=AXIAL-0.9, Published=24-Mar-1999, Publisher="Altium Limited"
L5 L6 L7 L8 L9 L10: library part Inductor, "Inductor", Code_IEC=1005, Code_JEITA=0402, LatestRevisionDate=29-May-2009, LatestRevisionNote="IPC-7351 Footprint Added.", PackageDescription="Chip Inductor", PackageReference=0402-A, Published=8-Jun-2000, Publisher="Altium Limited"
P1: "WR-MPC4 THT Male Right Angled Header, pitch 4.2mm, 2p", Contact Resistance=10mOhm, Insulation Resistance=1000MOhm, Manufacturer="Wurth Elektronik", Max Operating Temperature=105°C, Min Operating Temperature=-40°C, Rated Current=9A, Working Voltage=600VAC, Category="Wire-to-Board Connectors", ComponentLink1Description="Website Link", ComponentLink1URL=https://www.we-online.com/redexpert/article/64900229522?ad, ComponentLink2Description="Datasheet Link", ComponentLink2URL=https://www.we-online.com/redexpert/spec/64900229522?ad, Gender=Male, Manufacturer Part Number=64900229522, Match Code=WR-MPC4, Mount="Through Hole", Number of Pins=2, Number of Rows=2, Orientation="Right Angled", Packaging=Tray, Pitch=4.2mm
P2: "WR-BHD Male Box Header, THT Straight, pitch 2.54 mm, 2 Rows, 6 Pins", Contact Resistance="20 mΩ", Insulation Resistance="1000 MΩ", Manufacturer="Wurth Elektronik", Max Operating Temperature="105 °C", Min Operating Temperature="-40 °C", Rated Current="3 A", Withstanding Voltage="500 V", Working Voltage="250 V", Category="Wire-to-Board Connector", ComponentLink1Description="Website Link", ComponentLink1URL=https://www.we-online.com/redexpert/article/61200621621?ad, ComponentLink2Description="Datasheet Link", ComponentLink2URL=https://www.we-online.com/redexpert/spec/61200621621?ad, Gender=Male, Height="9.1 mm", Length="15.28 mm", Manufacturer Part Number=61200621621, Match Code=WR-BHD, Mount="Through Hole", Number of Pins=6, Number of Rows=2, Orientation=Straight, Packaging=Tray, Pitch="2.54 mm", Width="9.1 mm"
Q1 Q2 Q3 Q4 Q5 Q6 Q7: library part N-Trans
R1 R2 R3 R4 R5 R6 R7 R8 R9 R10 R11 R12 R13 R14 R15 R16 R17 R18 R19 R20 R21 R22 R23 R24 R25 R26 R27 R28 R29 R30 R31 R32 R33 R34 R35 R36 R37 R38 R39 R40 R41 R42 R43 R44 R45 R46 R47 R48 R49 R50 R51 R52 R53 R54 R55 R56 R57 R58 R59: library part Resistor
SW1 SW2 SW3: "WS-TASV SMT Tact Switch, 6mm x 3.5mm, 160gf, SPST-NO, 12V, 50mA", Manufacturer="Wurth Elektronik", Max Operating Temperature=85°C, Min Operating Temperature=-40°C, Rated Current=50mA, Rated Voltage (DC)=12V, Category="Tact Switch", Circuit=SPST-NO, ComponentLink1Description="Website Link", ComponentLink1URL=https://www.we-online.com/redexpert/article/434121050816?ad, ComponentLink2Description="Datasheet Link", ComponentLink2URL=https://www.we-online.com/redexpert/spec/434121050816?ad, Contact Material="Stainless Steel", Contact Plating=Silver, Height=5mm, Length=6mm, Manufacturer Part Number=434121050816, Match Code=WS-TASV, Mount="Surface Mount", Operation Force=160gf, Packaging="Tape and Reel", Terminal Material="Copper Alloy", Terminal Plating=Silver, Washable=No, Width=3.5mm
U1: "5A, 30V, 420kHz Step-Down Converter", Package=None, Check_prices=https://www.snapeda.com/parts/MP2482/Monolithic+Power+Systems+Inc./view-part/?ref=eda, MF="Monolithic Power Systems Inc.", MP=MP2482, SnapEDA_Link=https://www.snapeda.com/parts/MP2482/Monolithic+Power+Systems+Inc./view-part/?ref=snap
U2: "1.2MHz 2A Step Up Converter 85T"
U3: "2A switching buck 8.4V/4.2V battery / charger IC"
U4: "Linear Voltage Regulator IC Positive Fixed 1 Output 600mA SOT-25", Package="SOT-753 Diodes Inc.", Availability="In Stock", Check_prices=https://www.snapeda.com/parts/AP2112K-3.3TRG1/Diodes+Inc./view-part/?ref=eda, MF="Diodes Inc.", MP=AP2112K-3.3TRG1, Price=None, Purchase-URL=https://pricing.snapeda.com/search/part/AP2112K-3.3TRG1/?ref=eda, SnapEDA_Link=https://www.snapeda.com/parts/AP2112K-3.3TRG1/Diodes+Inc./view-part/?ref=snap
U5: "2-A, 28-V Input, Step-Down DC-DC Converter"
U7: "I2C realtime clock (RTC)"
U8: library part W25Q256JV, "256M-bit (32MB) Serial Flash memory"
U9: "LTE-FDD/LTE-TDD/HSPA+/UMTS/EDGE/GPRS/GSM Module On Module 10Mbps 800MHz/850MHz/900MHz/1800MHz/2100MHz/2300MHz/2500MHz/2600MHz 3.4V to 4.2V 24dBm", Package="SMD-87 SIMCom", Check_prices=https://www.snapeda.com/parts/SIM7600E/SIMCom/view-part/?ref=eda, MF="SIMCom Wireless Solutions Limited", MP=SIM7600E, SnapEDA_Link=https://www.snapeda.com/parts/SIM7600E/SIMCom/view-part/?ref=snap
U10: "Accelerometer X, Y, Z Axis Â±2g, 4g, 6g, 8g, 16g 1.56Hz ~ 800Hz 16-LGA _3x3_", Package="LGA-16 STMicroelectronics", Availability=Unavailable, MF=STMicroelectronics, MP=LIS3DSH, Price=None, SnapEDA_Link=https://www.snapeda.com/parts/LIS3DSH/STMicroelectronics/view-part/422648/?ref=snap
Y1: library part Resonator

## Via types
v1: diameter 0.8, hole 0.5, Top Layer to Bottom Layer, tented both sides, 283 vias
v2: diameter 0.6, hole 0.3, Top Layer to Bottom Layer, tented both sides, 69 vias
v3: diameter 0.5, hole 0.2, Top Layer to Bottom Layer, 4 vias

## Nets (pads, with @x,y where several pads share a name; then routed paths per layer and width w, separated by ;. In a path a pad name is that pad's centre, name@x,y a point inside that pad or via, vN(x,y) a via of type N, cw(c..) or ccw(c..) an arc to the next point about the centre after c; other vN are vias at no path point)
+1.8V: C61.1 C62.1 C63.1 R45.1 R46.1 R47.1 R48.1 R49.1 U9.15 | length 86.1
  Top Layer w0.16: v1@12.179,35.394 v1(12.212,35.36)
  Top Layer w0.5: U9.15@9.576,35.394 v1@12.179,35.394 ; R47.1@33.191,64.718 C61.1@34.461,64.718 R45.1@38.906,64.718 45.153,64.718 C63.1@45.383,64.488 R49.1@46.653,64.488 46.756,64.591 R48.1@48.431,64.591 C62.1@49.828,64.591 R46.1@54.527,64.591 54.596,64.66 v1(55.812,64.66)
  Bottom Layer w0.5: v1(12.212,35.36) 16.932,35.36 34.332,52.76 51.032,52.76 56.732,58.46 56.732,63.74 v1(55.812,64.66)
+3.3V-MCU: C30.2 C31.2 C32.2 C36.2 C37.2 L6.1 U6.2 U6.3 U6.20 U6.46 U6.55 U6.56 | length 56.2
  Top Layer w0.16: U6.20@26.968,80.372 27.878,80.372 28.111,80.605 28.111,82.162 28.205,82.256 32.208,82.256 32.302,82.35 32.302,83.306 U6.3@32.318,83.322 ; U6.46@34.068,78.372 33.232,78.372 33.064,78.54 33.064,81.875 33.161,81.972 U6.55@34.068,81.972
  Top Layer w0.8: C36.2@38.679,85.507 C30.2@39.949,85.507 ; C30.2@39.96,85.507 C32.2@41.219,85.507 C37.2@42.489,85.507 C31.2@43.759,85.507 72.994,85.507 73.987,86.5 L6.1@80.937,86.5
+5V: C5.2 C12.2 C22.2 C23.2 C24.1 D1.2 D5.2 R4.2 U4.1 U4.3 U5.2
+5V-BUCK: C6.1 C7.2 C8.2 D2.2 D5.1 R3.2 R11.2 U3.1 U3.4 U3.5 U3.16 | length 26.9
  Top Layer w0.4: R3.2@49.293,13.386 49.316,13.409 50.109,13.409 50.5,13.8 50.5,17.8 51.2,18.5 62.4,18.5 63,17.9 63,11.8 63.3,11.5 C6.1@65.3,11.5
+12V: C2.1 D3.1 P1.2 R5.2 R8.1 U1.8 | length 13
  Top Layer w0.16: C2.1@39.659,11.385 39.659,14.887 39.753,14.981 45.882,14.981 R5.2@46.136,14.727 46.136,15.743 46.331,15.938 R8.1@47.908,15.938
ANT: C26.2 L5.1 U6.1 | length 8.4
  Top Layer w0.16: C26.2@33.052,87.717 33.118,87.651 U6.1@33.118,83.322 ; C26.2@33.058,87.717 L5.1@33.058,89.046 ; C26.2@33.058,87.717 L5.1@33.058,89.046 ; C26.2@33.058,87.717 L5.1@33.058,89.046
AUX-ANT: C48.2 R39.1 U9.59 | length 3.7
  Top Layer w0.16: U9.59@39.776,48.394 C48.2@42.456,48.394 R39.1@43.484,48.394
BATTERY+: B1.1 C4.2 C10.2 C14.2 C15.2 L1.1 R10.2 R12.2 U2.4 U2.5 U3.9 | length 18.9
  Top Layer w0.16: R12.2@74.95,5.4 75.1,5.55 75.1,6 v1(76.6,7.5) 77.655,7.5 77.725,7.57 U3.9@77.725,7.6
  Bottom Layer w0.16: v1(68.6,14.5) 68.6,7.7 68.9,7.4 76.5,7.4 v1(76.6,7.5)
BOOT-IO0: P2.6 U6.5 | length 18.2
  Top Layer w0.16: P2.6@19.094,93.813 24.196,88.711 28.624,88.711 31.518,85.818 U6.5@31.518,83.322
ESP-RESET: C38.1 P2.1 R33.1 SW1.2 U6.4 | length 66.2
  Top Layer w0.16: C38.1@7.099,70.451 R33.1@4.559,70.451 4.559,68.148 4.653,68.054 SW1.2@5.6,68.054 8.124,68.054 8.5,68.43 v2(8.5,72.7) ; P2.1@24.174,96.353 28.365,92.162 28.365,89.636 31.92,86.081 31.92,84.494 31.918,84.492 U6.4@31.918,83.322
  Bottom Layer w0.16: v2(8.5,72.7) 14.305,78.505 14.305,94.993 16.808,97.496 24.08,97.496 24.174,97.402 P2.1@24.174,96.353
FL-CLK: U6.33 U8.6 | length 5.3
  Top Layer w0.16: U8.6@26.95,73.06 27.145,73.254 27.145,74.034 27.238,74.128 29.082,74.128 29.518,74.564 U6.33@29.518,76.222
FL-CS: U6.32 U8.1 | length 12.2
  Top Layer w0.16: U8.1@24.41,65.96 24.428,65.978 v2(24.428,67.524) ; v2(28.873,74.636) 28.873,74.755 29.118,75 U6.32@29.118,76.222
  Bottom Layer w0.16: v2(24.428,67.524) 28.873,71.969 v2(28.873,74.636)
FL-DI: U6.35 U8.5 | length 4.8
  Top Layer w0.16: U8.5@28.22,73.06 29.583,73.06 30.318,73.795 U6.35@30.318,76.222
FL-DO: U6.34 U8.2 | length 12
  Top Layer w0.16: U8.2@25.68,65.96 25.698,65.978 v2(25.698,67.524) ; v2(29.38,73.62) 29.918,74.158 U6.34@29.918,76.222
  Bottom Layer w0.16: v2(25.698,67.524) 29.374,71.2 29.374,73.614 v2(29.38,73.62)
FL-HD: U6.30 U8.7 | length 5
  Top Layer w0.16: U8.7@25.68,73.06 25.68,74.262 26.816,75.398 28.111,75.398 28.317,75.603 28.317,76.22 U6.30@28.318,76.222
FL-VDD: C41.2 C42.2 U6.29 U8.8 | length 10
  Top Layer w0.16: C41.2@21.489,70.641 C42.2@22.759,70.641 22.759,71.898 23.92,73.06 U8.8@24.41,73.06 24.41,73.61 26.602,75.802 27.898,75.802 27.918,75.822 U6.29@27.918,76.222
FL-WP: U6.31 U8.3 | length 14.5
  Top Layer w0.16: U6.31@28.718,76.222 28.718,75.37 28.111,74.763 26.968,74.763 26.333,74.128 26.333,68.921 26.968,68.286 ; 26.968,68.286 26.968,65.96 26.968,68.286